# Altium PCB hw_ESP8266_RFID_WinformC#_DiemDanhSV.PcbDoc
Units mm, origin at the board's own origin, x right, y up, seen from the top; angles counter-clockwise.
Board outline 100 x 70 mm, 2 copper layers (Top Layer, Bottom Layer); 5 components, 11 nets, 31 pads, 4 vias.
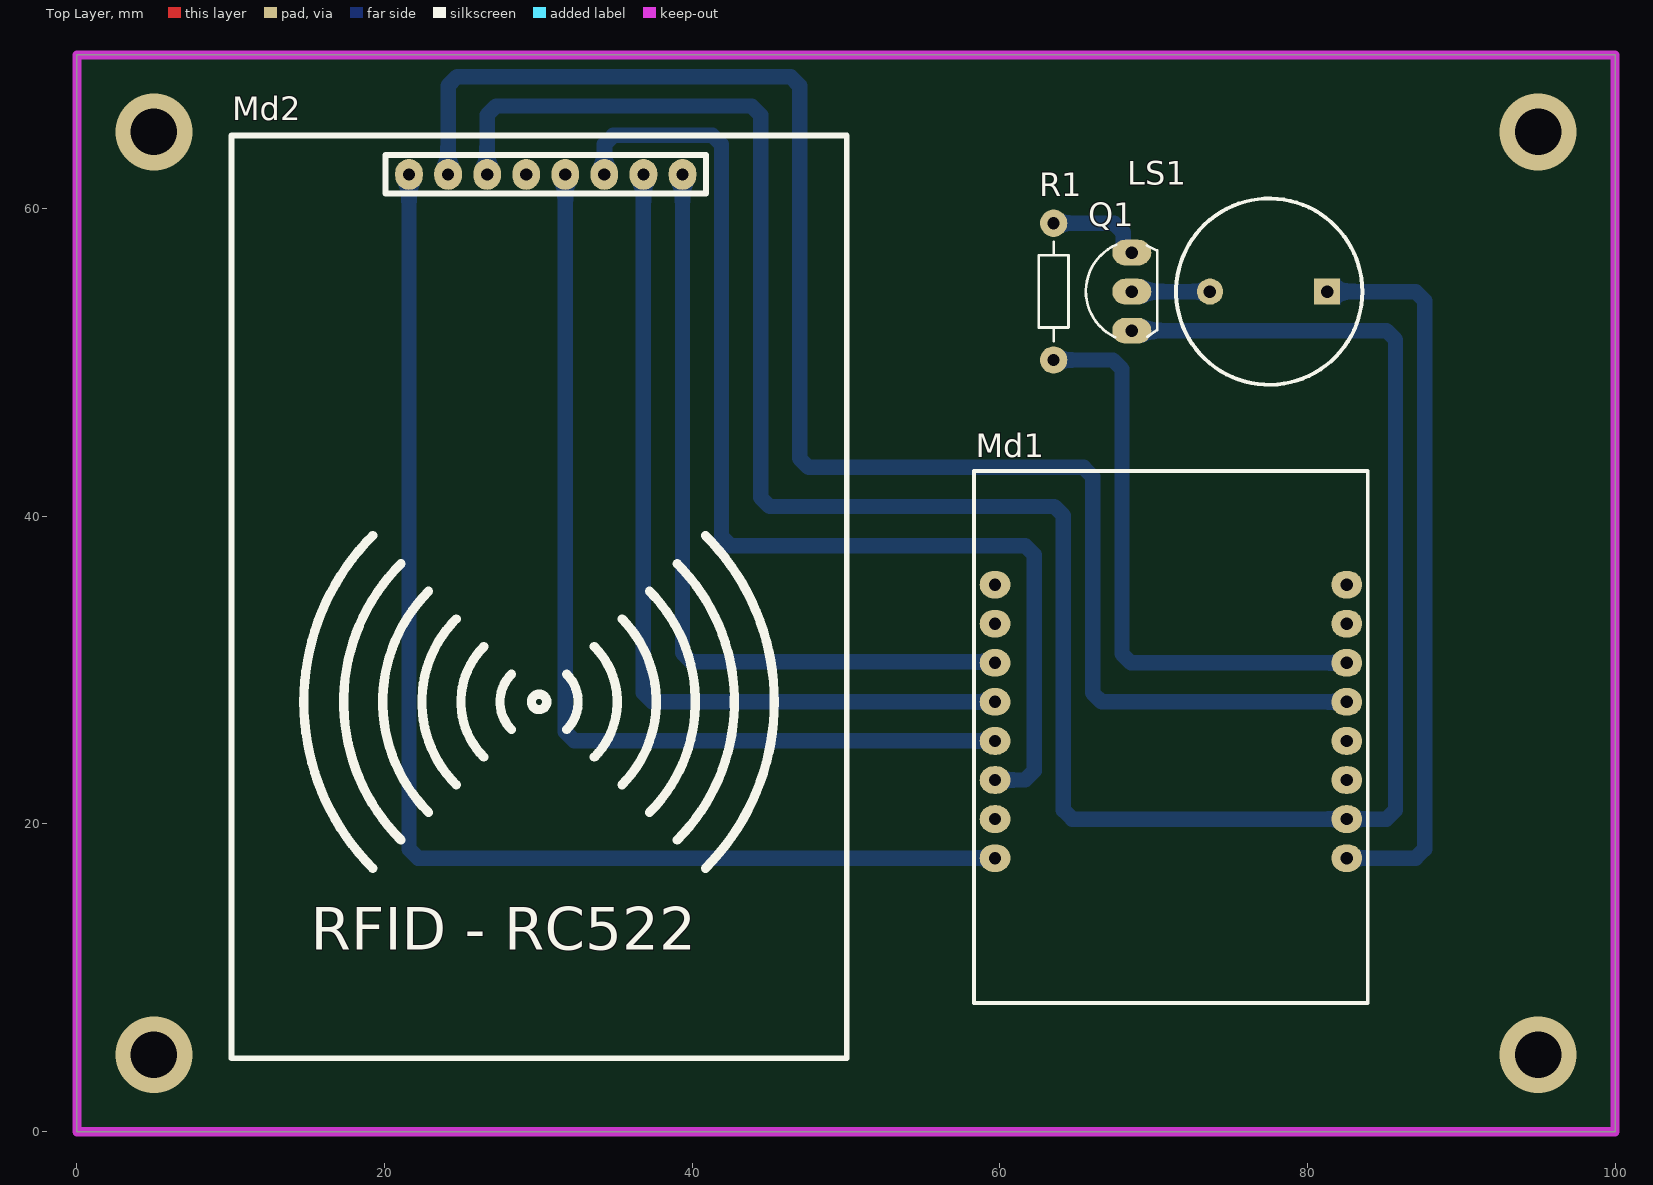
[diagram p0: Top Layer view]
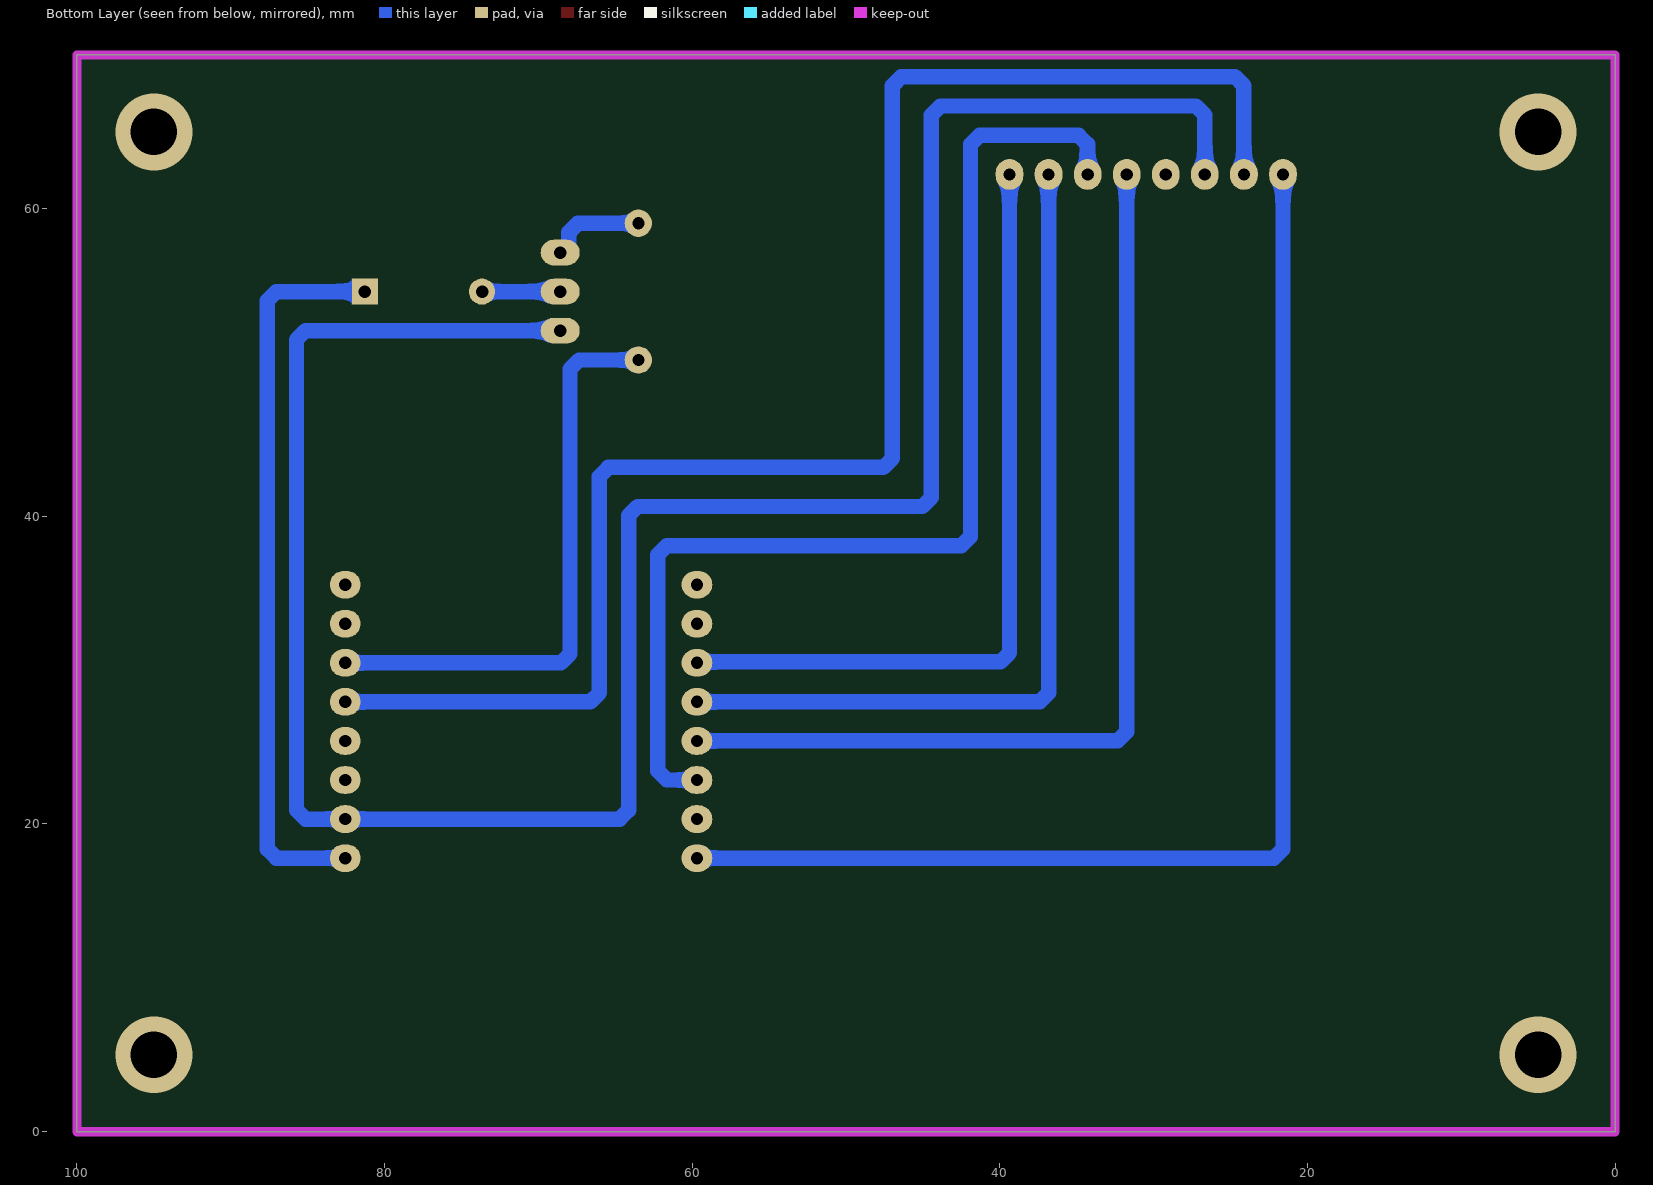
[diagram p1: Bottom Layer view, seen from below]
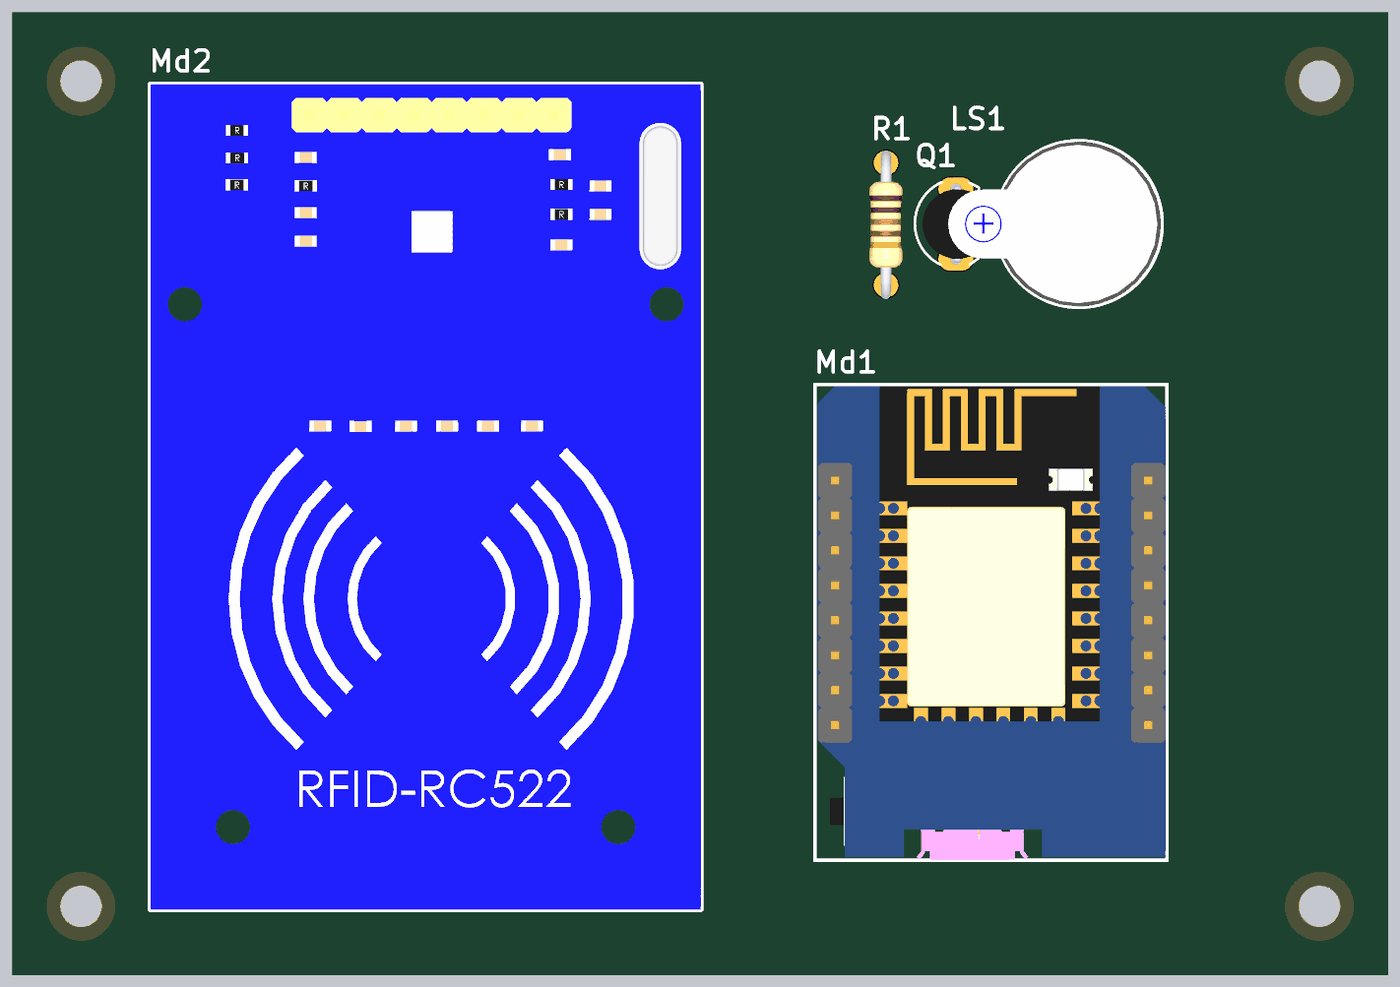
[diagram p2: 3D render of the assembled board from above, using the file's embedded part models]

## Layer stack, top to bottom
Top Solder: solder mask 0.0102, Solder Resist, Dk 3.5
Top Layer: signal copper 0.0356
Dielectric 1: dielectric 0.32, FR-4, Dk 4.8
Bottom Layer: signal copper 0.0356
Bottom Solder: solder mask 0.0102, Solder Resist, Dk 3.5

## Board outline
0,0 100,0 100,70 0,70

## Design rules (kind name [scope] priority, off if disabled: settings)
Clearance [All] p1: gap=0.254 ignorepadtopadclearanceinfootprint=FALSE except(0: Arc-Hole Track-Hole SMDPad-Hole THPad-Hole Via-Hole Fill-Hole Poly-Hole Region-Hole Text-Hole)
PolygonConnect [All] p1: connectstyle=Relief reliefconductorwidth=0.254 reliefentries=4 polygonreliefangle="90 Angle" airgapwidth=0.254
RoutingVias [All] p1: holewidth=0.711 width=1.27 viastyle="Through Hole" minholewidth=0.711 minwidth=1.27 maxholewidth=0.711 maxwidth=1.27
SolderMaskExpansion [All] p1: expansion=0.102 istentingtop=FALSE
Width [All] p1: maxlimit=4 minlimit=0.254 preferedwidth=1
30 further rules are at their usual default settings.

## Components (designator, comment, footprint, x,y, rotation, side; value= is the part's Value field where it differs from the comment)
LS1 "Buzzer" Buzzer 81.28,54.61 r180 top
Md1 "ESP8266_WemosD1_mini" "ESP8266 WemosD1 mini" 59.69,35.56 r0 top
Md2 "RC522 Module RFID" RC522_Module 21.59,62.23 r0 top
Q1 "C1815" QTO-92 68.58,54.61 r90 top
R1 "1k" R1/4W 63.5,50.165 r90 top value="R1/4W - 1K"

## Footprints (in the part's own frame and the unit in brackets; to place one, negate y for a bottom-side part, rotate by r counter-clockwise, add the part's x,y. Pads: shape width x height; smd on the part's side, far side on the other; paste and mask are expansions set on the pad)
Buzzer [mil] "Buzzer; Solder Pad 35mil"
  rect 67x67 hole 32: 1(0,0)
  round 67 hole 32: 2(300,0)
  silkscreen extent -90,-238 386,238, body extent -86,-236 522,236, height 177
"ESP8266 WemosD1 mini" [mm] "ESP8266 WemosD1 mini"
  oval 2x1.8 hole 0.8: 1(0,0) 2(0,-2.54) 3(0,-5.08) 4(0,-7.62) 5(0,-10.16) 6(0,-12.7) 7(0,-15.24) 8(0,-17.78) 9(22.86,-17.78) 10(22.86,-15.24) 11(22.86,-12.7) 12(22.86,-10.16) 13(22.86,-7.62) 14(22.86,-5.08) 15(22.86,-2.54) 16(22.86,0)
  silkscreen extent -1.37,-27.21 24.23,7.39, body extent -1.15,-27.16 24.15,7.26
QTO-92 [mil] "TO-92"
  oval 66x100 hole 32: 1(-100,0) 2(0,0) 3(100,0)
  silkscreen extent -117,-65 120,118, body extent -109,-66 109,95, height 245
R1/4W [mil] "R 1/4W, 2 Pin, 350mil"
  round 70 hole 31: 1(0,0) 2(350,0)
  silkscreen extent 48,-38 302,38, body extent -40,-47 386,47, height 111
RC522_Module [mm] "RC522 RFID Module"
  oval 1.8x2 hole 0.8: 1(0,0) 2(2.54,0) 3(5.08,0) 4(7.62,0) 5(10.16,0) 6(12.7,0) 7(15.24,0) 8(17.78,0)
  silkscreen extent -11.54,-57.46 28.46,2.54, body extent -11.54,-57.46 28.46,2.54, height 15.74

## Part data
LS1: "Magnetic Transducer Buzzer", ComponentLink1Description="Manufacturer Link", ComponentLink1URL=http://www.megastar.com/linecard/buzzmode/index.php, DatasheetDocument=17-Dec-2003, LatestRevisionDate=17-Dec-2003, LatestRevisionNote="Schematic revised, PCB Footprint replaced.", PackageReference=ABSM-1574, Published=24-Mar-1999, Publisher="Altium Limited"
Md2: library part RFID_RC522_Module
Q1: library part C1815_1, "NPN 600mW, ECB"
R1: library part R1/4W, "Resistor 1/4W"

## Via types
v1: diameter 5, hole 3, Top Layer to Bottom Layer, 4 vias

## Nets (pads, with @x,y where several pads share a name; then routed paths per layer and width w, separated by ;. In a path a pad name is that pad's centre, name@x,y a point inside that pad or via, vN(x,y) a via of type N, cw(c..) or ccw(c..) an arc to the next point about the centre after c; other vN are vias at no path point)
3.3V: Md1.8 Md2.1 | length 82.2
  Bottom Layer w1: Md2.1 21.59,18.366 22.176,17.78 Md1.8
BUZZ: Md1.14 R1.1 | length 38
  Bottom Layer w1: R1.1 67.359,50.165 67.945,49.579 67.945,31.066 68.531,30.48 Md1.14
GND: Md1.10 Md2.3 Q1.1 | length 156.3
  Bottom Layer w1: Md2.3 26.67,66.089 27.256,66.675 43.864,66.675 44.45,66.089 44.45,41.226 45.036,40.64 63.549,40.64 64.135,40.054 64.135,20.906 64.721,20.32 Md1.10 85.139,20.32 85.725,20.906 85.725,51.484 85.139,52.07 Q1.1
MISO: Md1.5 Md2.5 | length 64.4
  Bottom Layer w1: Md2.5 31.75,25.986 32.336,25.4 Md1.5
MOSI: Md1.6 Md2.6 | length 73.2
  Bottom Layer w1: Md2.6 34.29,64.184 34.876,64.77 41.324,64.77 41.91,64.184 41.91,38.686 42.496,38.1 61.644,38.1 62.23,37.514 62.23,23.446 61.644,22.86 Md1.6
NetLS1_2: LS1.2 Q1.2 | length 5.1
  Bottom Layer w1: Q1.2 LS1.2
NetQ1_3: Q1.3 R1.2 | length 6.5
  Bottom Layer w1: R1.2 67.433,59.055 68.019,58.469 68.019,57.462 68.331,57.15 Q1.3
RST: Md1.13 Md2.2 | length 103.7
  Bottom Layer w1: Md2.2 24.13,67.994 24.716,68.58 46.404,68.58 46.99,67.994 46.99,43.766 47.576,43.18 65.454,43.18 66.04,42.594 66.04,28.526 66.626,27.94 Md1.13
SCK: Md1.4 Md2.7 | length 56.8
  Bottom Layer w1: Md2.7 36.83,28.526 37.416,27.94 Md1.4
SS: Md1.3 Md2.8 | length 51.7
  Bottom Layer w1: Md2.8 39.37,31.128 39.956,30.542 59.628,30.542 Md1.3
VCC: LS1.1 Md1.9 | length 47.6
  Bottom Layer w1: LS1.1 87.034,54.61 87.62,54.024 87.62,18.366 87.034,17.78 Md1.9
pads on no net: Md1.1 Md1.2 Md1.7 Md1.11 Md1.12 Md1.15 Md1.16 Md2.4
copper on no net:
  other v1: 5,5 95,5 5,65 95,65

## Keep-outs
Keep-Out Layer:
  the board outline again, w0.6

## Text inside footprints (layer, text, board x,y; h text height)
Md2: Top Overlay "RFID - RC522" at 15.217,10.909 h4.7